# Altium PCB NB_Bagde.PcbDoc
Units mm, origin at the board's own origin, x right, y up, seen from the top; angles counter-clockwise.
Board outline 71 x 35.5 mm, 2 copper layers (Top Layer, Bottom Layer); 29 components, 24 nets, 54 pads, 24 vias.
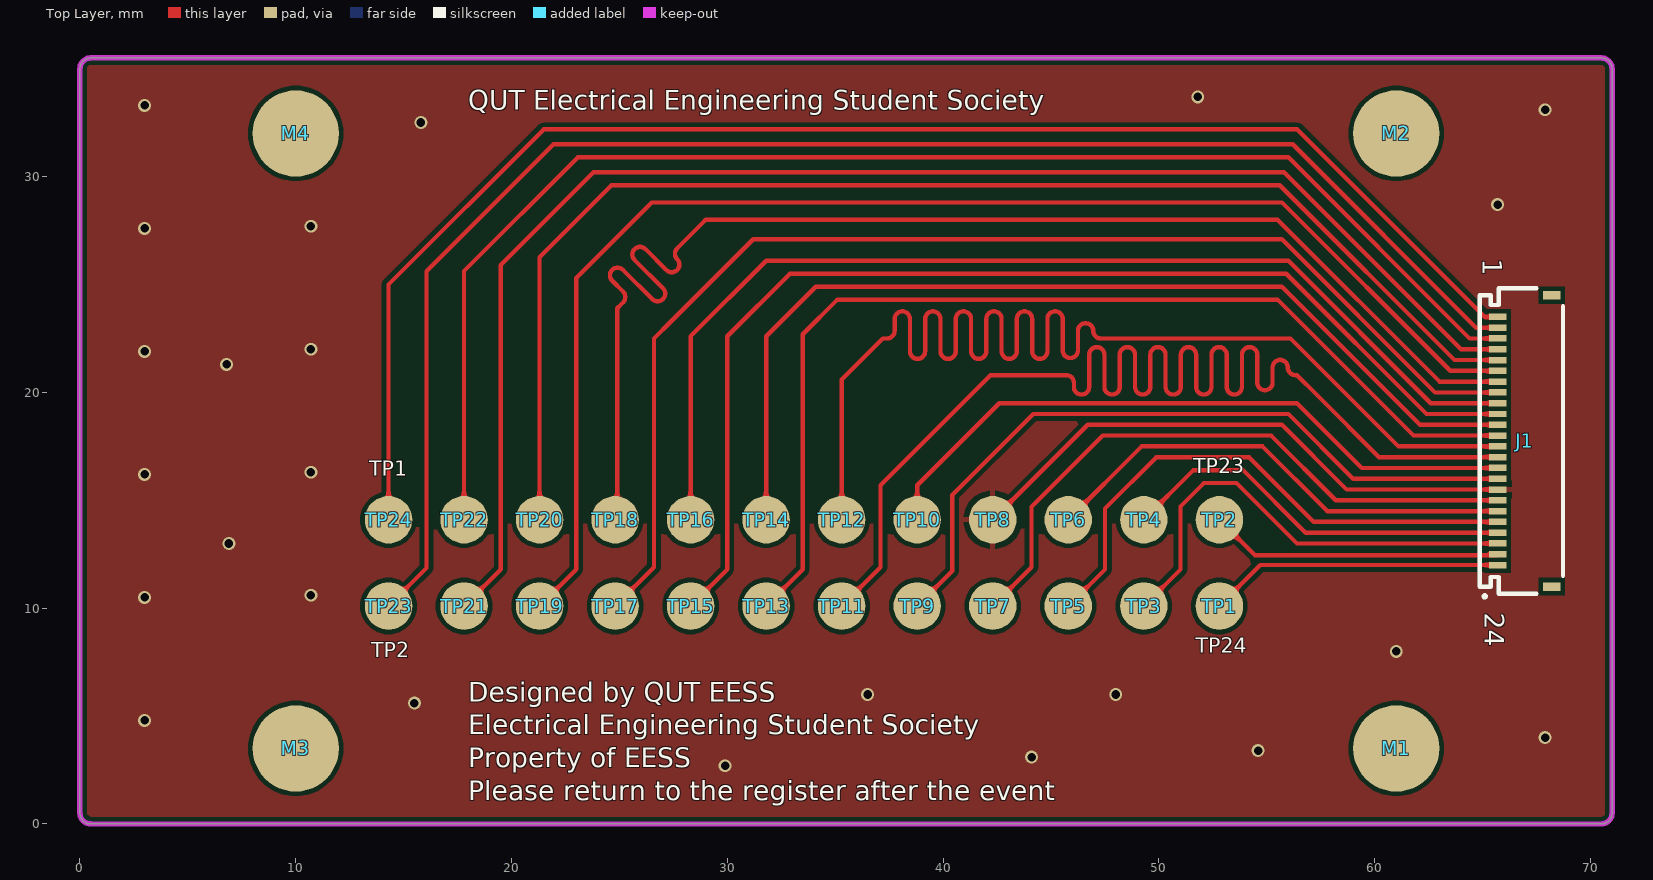
[diagram p0: Top Layer view]
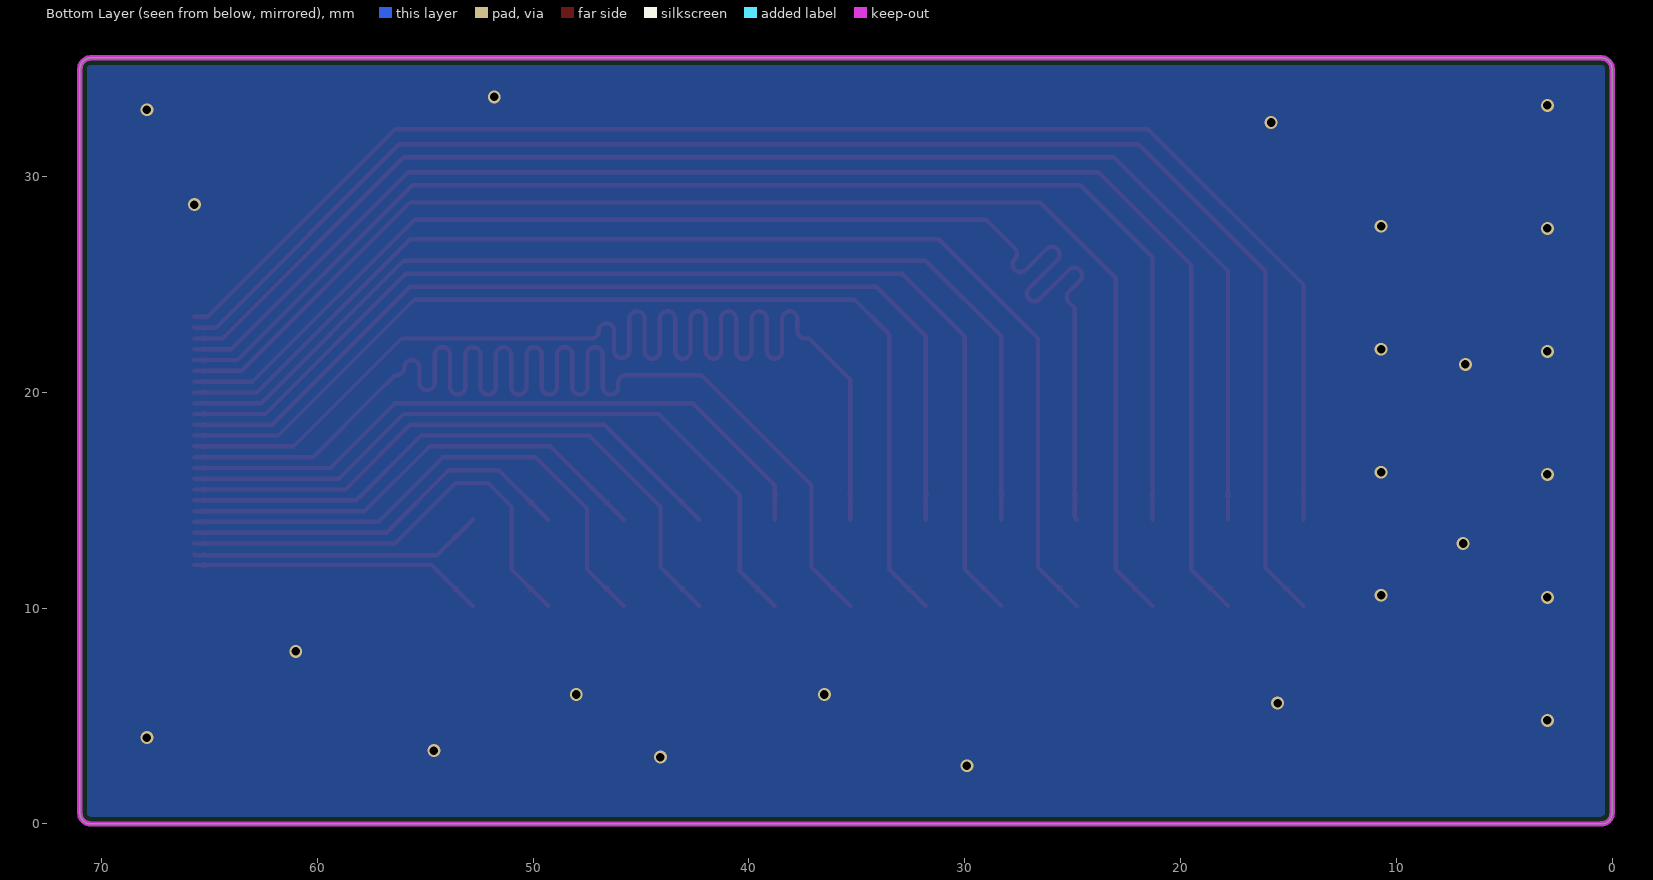
[diagram p1: Bottom Layer view, seen from below]

## Layer stack, top to bottom
Top Solder: solder mask 0.0102, Solder Resist, Dk 3.5
Top Layer: signal copper 0.0356
Dielectric 1: dielectric 0.32, FR-4, Dk 4.8
Bottom Layer: signal copper 0.0356
Bottom Solder: solder mask 0.0102, Solder Resist, Dk 3.5

## Board outline
0,0.502 0,35 cw(c0.5,35) 0.5,35.5 70.5,35.5 cw(c70.5,35) 71,35 71,0.5 cw(c70.5,0.5) 70.5,0 0.5,0 0.5,0.002 cw(c0.5,0.502)

## Design rules (kind name [scope] priority, off if disabled: settings)
Clearance [All] p1: gap=0.2 ignorepadtopadclearanceinfootprint=FALSE
MinimumSolderMaskSliver [All] p1: minsoldermaskwidth=0.1
PolygonConnect [All] p1: thpad.connectstyle=Relief thpad.reliefconductorwidth=0.254 thpad.reliefentries=4 thpad.polygonreliefangle="90 Angle" thpad.airgapwidth=0.254 smdpad.connectstyle=Relief smdpad.reliefconductorwidth=0.254 smdpad.reliefentries=4 smdpad.polygonreliefangle="90 Angle" smdpad.airgapwidth=0.254 via.connectstyle=Direct via.reliefconductorwidth=0.254 via.reliefentries=4 via.polygonreliefangle="90 Angle" via.airgapwidth=0.254
RoutingVias [All] p1: holewidth=0.3 width=0.6 viastyle="Through Hole" minholewidth=0.3 minwidth=0.6 maxholewidth=0.711 maxwidth=1.27
SilkToSolderMaskClearance [IsPad] p1: minsilkscreentomaskgap=0.1 clearancetoexposedcopper=TRUE
SolderMaskExpansion [All] p1: expansion=0.102 istentingtop=FALSE
Width [All] p1: maxlimit=2 minlimit=0.2 preferedwidth=0.2 minimp=50.000000 maximp=50.000000 favimp=50.000000
28 further rules are at their usual default settings.

## Components (designator, comment, footprint, x,y, rotation, side; value= is the part's Value field where it differs from the comment)
J1 "687124182122" 687124182122 66.8,17.75 r90 top
M1 "Magnet" Magnet 61,3.5 r90 top
M2 "Magnet" Magnet 61,32 r90 top
M3 "Magnet" Magnet 10,3.5 r0 top
M4 "Magnet" Magnet 10,32 r0 top
TP1 "Test_Point_2MM" Test_Point_2mm 52.8,10.1 r0 top
TP2 "Test_Point_2MM" Test_Point_2mm 52.8,14.1 r90 top
TP3 "Test_Point_2MM" Test_Point_2mm 49.3,10.1 r90 top
TP4 "Test_Point_2MM" Test_Point_2mm 49.3,14.1 r90 top
TP5 "Test_Point_2MM" Test_Point_2mm 45.8,10.1 r90 top
TP6 "Test_Point_2MM" Test_Point_2mm 45.8,14.1 r90 top
TP7 "Test_Point_2MM" Test_Point_2mm 42.3,10.1 r90 top
TP8 "Test_Point_2MM" Test_Point_2mm 42.3,14.1 r90 top
TP9 "Test_Point_2MM" Test_Point_2mm 38.8,10.1 r90 top
TP10 "Test_Point_2MM" Test_Point_2mm 38.8,14.1 r90 top
TP11 "Test_Point_2MM" Test_Point_2mm 35.3,10.1 r90 top
TP12 "Test_Point_2MM" Test_Point_2mm 35.3,14.1 r90 top
TP13 "Test_Point_2MM" Test_Point_2mm 31.8,10.1 r180 top
TP14 "Test_Point_2MM" Test_Point_2mm 31.8,14.1 r90 top
TP15 "Test_Point_2MM" Test_Point_2mm 28.3,10.1 r90 top
TP16 "Test_Point_2MM" Test_Point_2mm 28.3,14.1 r90 top
TP17 "Test_Point_2MM" Test_Point_2mm 24.8,10.1 r90 top
TP18 "Test_Point_2MM" Test_Point_2mm 24.8,14.1 r90 top
TP19 "Test_Point_2MM" Test_Point_2mm 21.3,10.1 r90 top
TP20 "Test_Point_2MM" Test_Point_2mm 21.3,14.1 r90 top
TP21 "Test_Point_2MM" Test_Point_2mm 17.8,10.1 r90 top
TP22 "Test_Point_2MM" Test_Point_2mm 17.8,14.1 r90 top
TP23 "Test_Point_2MM" Test_Point_2mm 14.3,10.1 r90 top
TP24 "Test_Point_2MM" Test_Point_2mm 14.3,14.1 r90 top

## Footprints (in the part's own frame and the unit in brackets; to place one, negate y for a bottom-side part, rotate by r counter-clockwise, add the part's x,y. Pads: shape width x height; smd on the part's side, far side on the other; paste and mask are expansions set on the pad)
687124182122 [mm] "ZIF Connectors, Horizontal, Dual Contact Back Locking, pitch 0.5mm, 24p"
  rect 0.3x0.8 smd: 1(-5.75,1.1) 2(-5.25,1.1) 3(-4.75,1.1) 4(-4.25,1.1) 5(-3.75,1.1) 6(-3.25,1.1) 7(-2.75,1.1) 8(-2.25,1.1) 9(-1.75,1.1) 10(-1.25,1.1) 11(-0.75,1.1) 12(-0.25,1.1) 13(0.25,1.1) 14(0.75,1.1) 15(1.25,1.1) 16(1.75,1.1) 17(2.25,1.1) 18(2.75,1.1) 19(3.25,1.1) 20(3.75,1.1) 21(4.25,1.1) 22(4.75,1.1) 23(5.25,1.1) 24(5.75,1.1)
  rect 0.4x0.8 smd: M1(-6.75,-1.4) M2(6.75,-1.4)
  silkscreen extent -7.27,-1.92 7.08,1.92, body extent -7,-1.85 7,1.85, height 0.98
Magnet [mm] "Magnet 3x2mm"
  round 4 smd: 1(0,0)
  body extent -1.5,-1.5 1.5,1.5, height 2
Test_Point_2mm [mm]
  round 2.2 smd: 1(0,0)

## Part data
J1: "WR-FPC SMT ZIF Horizontal Dual Contact, pitch 0.5mm, Horizontal, 24pins", Contact Resistance=30mΩ, Manufacturer="Wurth Elektronik", Operating Temperature Max=85°C, Operating Temperature Min=-55°C, Rated Current=0.5A, Working Voltage=50VAC, Category="FPC Connectors", ComponentLink1Description="Website Link", ComponentLink1URL=https://www.we-online.com/redexpert/article/687124182122?ad, ComponentLink2Description="Datasheet Link", ComponentLink2URL=https://www.we-online.com/redexpert/spec/687124182122?ad, Height=0.96mm, Length=14mm, Manufacturer Part Number=687124182122, Match Code=WR-FPC, Mount="Surface Mount", Number of Pins=24, Orientation=Horizontal, Packaging="Tape and Reel", Pitch=0.5mm, Width=3.7mm
M1 M2 M3 M4: "Magnet 3x2mm"
TP1 TP2 TP3 TP4 TP5 TP6 TP7 TP8 TP9 TP10 TP11 TP12 TP13 TP14 TP15 TP16 TP17 TP18 TP19 TP20 TP21 TP22 TP23 TP24: "Test Point"

## Via types
v1: diameter 0.6, hole 0.4, Top Layer to Bottom Layer, 24 vias

## Nets (pads, with @x,y where several pads share a name; then routed paths per layer and width w, separated by ;. In a path a pad name is that pad's centre, name@x,y a point inside that pad or via, vN(x,y) a via of type N, cw(c..) or ccw(c..) an arc to the next point about the centre after c; other vN are vias at no path point)
1-NC: J1.24 TP24.1 | length 68.9
  Top Layer w0.2: TP24.1 14.3,25 21.5,32.2 56.4,32.2 65.1,23.5 J1.24
2-GDR: J1.23 TP23.1 | length 71.8
  Top Layer w0.2: TP23.1 16.064,11.864 16.064,25.617 21.947,31.5 56.2,31.5 64.7,23 J1.23
3-RESE: J1.22 TP22.1 | length 65.1
  Top Layer w0.2: TP22.1 17.8,25.625 23.075,30.9 56,30.9 64.4,22.5 J1.22
4-NC: J1.21 TP21.1 | length 67.9
  Top Layer w0.2: TP21.1 19.5,11.8 19.5,25.9 23.8,30.2 55.8,30.2 64,22 J1.21
5-VSH2: J1.20 TP20.1 | length 61.3
  Top Layer w0.2: TP20.1 21.3,26.264 24.636,29.6 55.6,29.6 63.7,21.5 J1.20
6-SCL-T: J1.19 TP19.1 | length 63.3
  Top Layer w0.2: TP19.1 23,11.8 23,25.3 26.5,28.8 55.7,28.8 63.5,21 J1.19
7-SDA-T: J1.18 TP18.1 | length 63.3
  Top Layer w0.2: TP18.1 24.9,14.2 24.9,23.9 25.1,24.1 25.171,24.171 ccw(c24.92,24.421) 25.171,24.671 24.666,25.176 cw(c24.916,25.426) 24.666,25.677 cw(c24.916,25.426) 25.167,25.677 26.518,24.326 ccw(c26.768,24.576) 27.018,24.326 ccw(c26.768,24.576) 27.018,24.826 25.703,26.142 cw(c25.953,26.392) 25.703,26.642 cw(c25.953,26.392) 26.204,26.642 27.173,25.673 ccw(c27.424,25.923) 27.674,25.673 ccw(c27.424,25.923) 27.674,26.173 ; 27.674,26.173 cw(c27.924,26.424) 27.674,26.674 28.85,27.85 29,28 55.5,28 63,20.5 J1.18
8-BS1: J1.17 TP17.1 | length 57.1
  Top Layer w0.2: TP17.1 26.6,11.9 26.6,22.5 27.4,23.3 31.2,27.1 31.755,27.1 55.7,27.1 62.8,20 J1.17
9-BUSY: J1.16 TP16.1 | length 50.1
  Top Layer w0.2: TP16.1 28.3,22.6 31.8,26.1 56,26.1 62.6,19.5 J1.16
10-RES#: J1.15 TP15.1 | length 52.8
  Top Layer w0.2: TP15.1 30,11.8 30,22.6 32.9,25.5 55.9,25.5 62.4,19 J1.15
11-D/C#: J1.14 TP14.1 | length 46
  Top Layer w0.2: TP14.1 31.8,22.6 34.1,24.9 55.7,24.9 62.1,18.5 J1.14
12-CS#: J1.13 TP13.1 | length 48.8
  Top Layer w0.2: TP13.1 33.5,11.8 33.5,22.7 35.1,24.3 55.5,24.3 61.8,18 J1.13
13-SCL: J1.12 TP12.1 | length 63.3
  Top Layer w0.2: TP12.1 35.3,20.6 37.2,22.5 37.3,22.5 37.4,22.5 ccw(c37.4,22.854) 37.754,22.854 37.754,23.405 cw(c38.108,23.405) 38.462,23.405 38.462,21.91 ccw(c38.816,21.91) 39.17,21.91 39.17,23.405 cw(c39.524,23.405) 39.878,23.405 39.878,21.91 ccw(c40.232,21.91) 40.586,21.91 40.586,23.405 cw(c40.94,23.405) 41.294,23.405 41.294,21.91 ccw(c41.648,21.91) 42.002,21.91 42.002,23.405 cw(c42.356,23.405) 42.71,23.405 42.71,21.91 ccw(c43.064,21.91) 43.418,21.91 43.418,23.405 cw(c43.772,23.405) 44.126,23.405 44.126,21.91 ccw(c44.48,21.91) 44.834,21.91 44.834,23.405 cw(c45.188,23.405) 45.542,23.405 45.542,21.947 ccw(c45.896,21.947) 46.25,21.947 46.25,22.854 cw(c46.604,22.854) 46.958,22.854 ccw(c47.312,22.854) 47.312,22.5 51.6,22.5 56.1,22.5 61.1,17.5 J1.12
14-SDA: J1.11 TP11.1 | length 63.3
  Top Layer w0.2: TP11.1 37.1,11.9 37.1,15.7 42.2,20.8 44.9,20.8 45.708,20.8 cw(c45.708,20.446) 46.062,20.446 46.062,20.254 ccw(c46.416,20.254) 46.77,20.254 46.77,21.746 cw(c47.124,21.746) 47.478,21.746 47.478,20.254 ccw(c47.832,20.254) 48.186,20.254 48.186,21.746 cw(c48.54,21.746) 48.894,21.746 48.894,20.254 ccw(c49.248,20.254) 49.602,20.254 49.602,21.746 cw(c49.956,21.746) 50.31,21.746 50.31,20.254 ccw(c50.664,20.254) 51.018,20.254 51.018,21.746 cw(c51.372,21.746) 51.726,21.746 51.726,20.254 ccw(c52.08,20.254) 52.434,20.254 52.434,21.746 cw(c52.788,21.746) 53.142,21.746 53.142,20.254 ccw(c53.496,20.254) 53.85,20.254 53.85,21.746 cw(c54.204,21.746) 54.558,21.746 54.558,20.457 ccw(c54.912,20.457) 55.266,20.457 55.266,21.154 cw(c55.62,21.154) 55.974,21.154 ccw(c56.328,21.154) 56.328,20.8 56.4,20.8 57.3,19.9 60.2,17 J1.11
15-VDDIO: J1.10 TP10.1 | length 31.3
  Top Layer w0.2: TP10.1 38.8,15.696 42.604,19.5 56.4,19.5 59.4,16.5 J1.10
16-VCI: J1.9 TP9.1 | length 33.9
  Top Layer w0.2: TP9.1 40.426,11.726 40.426,15.244 44.182,19 56,19 59,16 J1.9
17-GND: J1.8 TP8.1 | length 26.5
  Top Layer w0.2: TP8.1 46.7,18.5 55.7,18.5 58.7,15.5 J1.8
  other v1: 29.9,2.7 44.1,3.1 54.6,3.4 67.9,4 3,4.8 15.5,5.6 36.5,6 48,6 61,8 3,10.5 10.7,10.6 6.9,13 3,16.2 10.7,16.3 6.8,21.3 3,21.9 10.7,22 3,27.6 10.7,27.7 65.7,28.7 15.8,32.506 67.9,33.1 3,33.3 51.8,33.7
18-VDD: J1.7 TP7.1 | length 29.6
  Top Layer w0.2: TP7.1 44.1,11.9 44.1,14.7 47.4,18 55.2,18 58.2,15 J1.7
19-VPP: J1.6 TP6.1 | length 22.6
  Top Layer w0.2: TP6.1 49.2,17.5 54.8,17.5 57.8,14.5 J1.6
20-VSH1: J1.5 TP5.1 | length 25.7
  Top Layer w0.2: TP5.1 47.5,11.8 47.5,14.617 49.882,17 54.181,17 57.18,14 J1.5
21-VGH: J1.4 TP4.1 | length 18.6
  Top Layer w0.2: TP4.1 51.6,16.4 53.9,16.4 56.8,13.5 J1.4
22-VSL: J1.3 TP3.1 | length 21.6
  Top Layer w0.2: TP3.1 51,11.8 51,14.717 52.083,15.8 53.6,15.8 56.4,13 J1.3
23-VGL: J1.2 TP2.1 | length 13.6
  Top Layer w0.2: TP2.1 54.45,12.45 65.65,12.45 J1.2
24-VCOM: J1.1 TP1.1 | length 13.7
  Top Layer w0.2: TP1.1 54.7,12 J1.1
pads on no net: J1.M1 J1.M2 M1.1 M2.1 M3.1 M4.1

## Polygon pours and split planes (outlines as drawn)
17-GND on Bottom Layer "17-GND_L02_P001" (solid, pour order 1): 0.001,0.001 0.001,35.5 71,35.5 71,0 0,0
17-GND on Top Layer "17-GND_L01_P002" (solid, pour order 2): 0.001,0.001 0.001,35.5 71,35.5 71,0 0,0

## Keep-outs
Keep-Out Layer:
  lines w0.254: 0,0.5 0,35 cw(c0.5,35) 0.5,35.5 70.5,35.5 cw(c70.5,35) 71,35 71,0.5 cw(c70.5,0.5) 70.5,0 0.5,0 ; 0,0.502 ccw(c0.5,0.502) 0.5,0.002

## Silkscreen, mask and mechanical layers (free items; w line width, h text height)
Top Overlay:
  text "QUT Electrical Engineering Student Society" at 18,32.8 h1.52
  text "1" at 64.7,26.2 h1.52 r270
  text "TP23" at 51.6,16.013 h1.2
  text "TP1" at 13.4,15.9 h1.2
  text "24" at 64.8,9.8 h1.52 r270
  text "TP24" at 51.7,7.7 h1.2
  text "TP2" at 13.5,7.5 h1.2
  text "Designed by QUT EESS / Electrical Engineering Student Society / Property of EESS / Please return to the register after the event" at 18,0.8 h1.52
Mechanical 1:
  lines w0.254: 0,0.5 0,35 cw(c0.5,35) 0.5,35.5 70.5,35.5 cw(c70.5,35) 71,35 71,0.5 cw(c70.5,0.5) 70.5,0 0.5,0 ; 0,0.502 ccw(c0.5,0.502) 0.5,0.002

## Dimensions
52.8,10.1 to 71,0.5 on Mechanical 2
14.3,10.1 to 0,0.5 on Mechanical 2
14.3,10.1 to 0.5,0 on Mechanical 2
14.3,10.1 to 52.8,10.1 on Mechanical 2
14.3,10.1 to 17.8,10.1 on Mechanical 2
14.3,10.1 to 14.3,14.1 on Mechanical 2
10,32 to 0.5,35.5 on Mechanical 2
10,3.5 to 0.5,0 on Mechanical 2
10,3.5 to 0,0.5 on Mechanical 2
61,3.5 to 71,0.5 on Mechanical 2
0.5,35.5 to 0.5,0 on Mechanical 2
0,0.5 to 71,0.5 on Mechanical 2